# EAGLE board cyclops_r3p1 (EAGLE 6.4)
Cyclops 3.0 PCB Cyclops R3.0 High power LED driver Linear current control Optional linear optical power control Built-in DAC Wide bandwidth Appropriate for scientific applications: e.g. fluorescent imaging and optogenetics
PCB: Cyclops r3.1; REVISION: 3.1
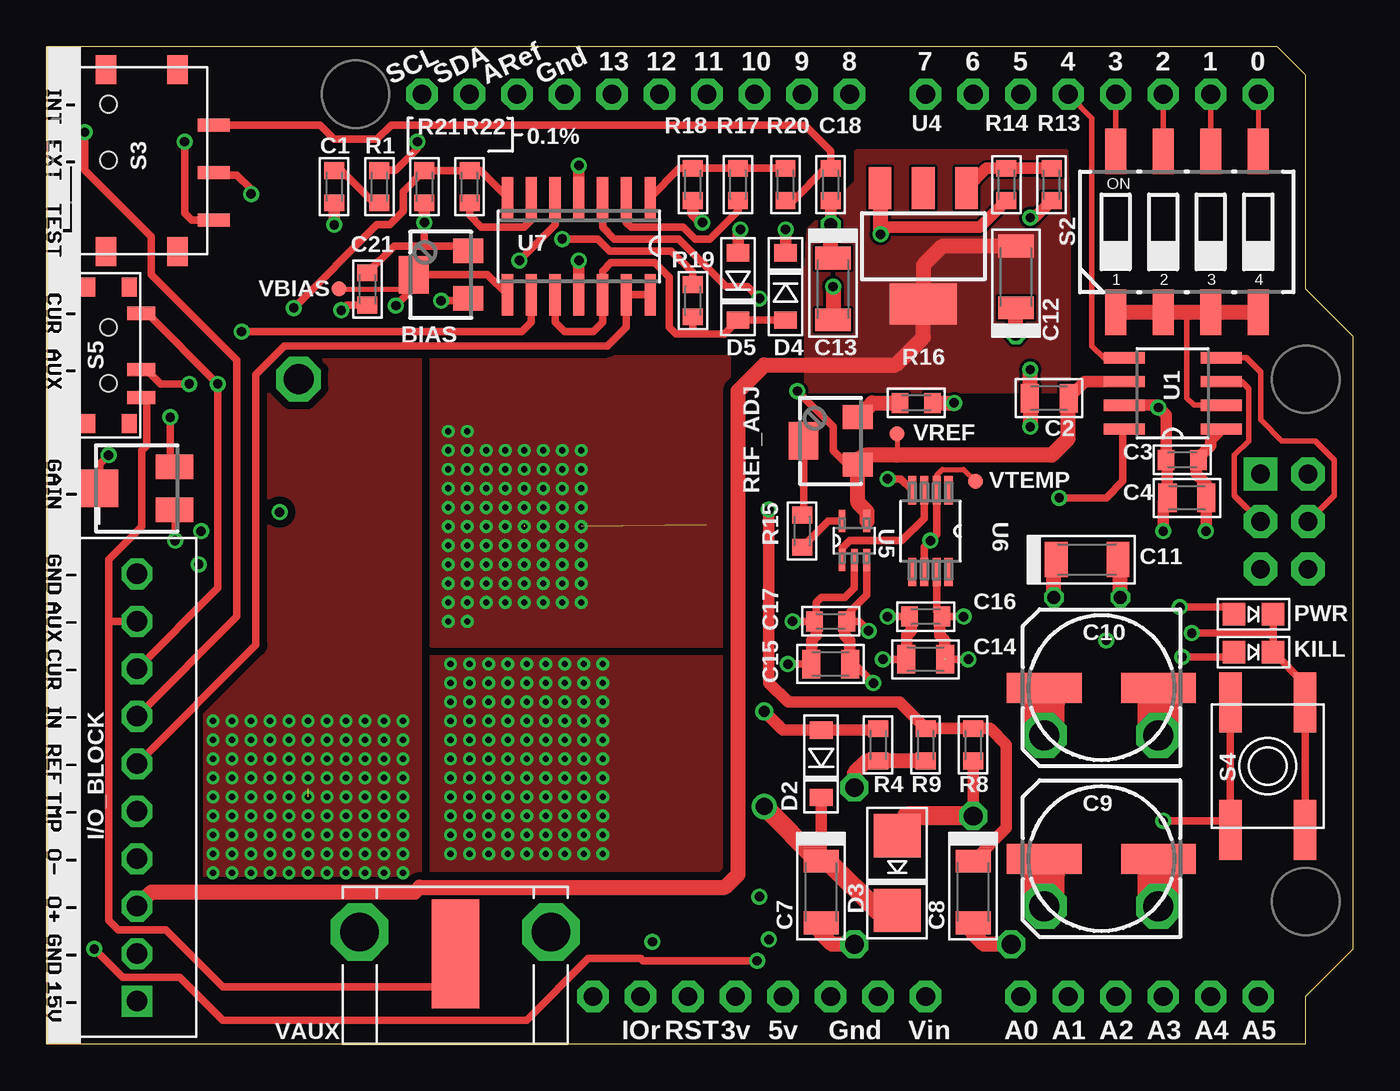
[diagram p0: board, top side]
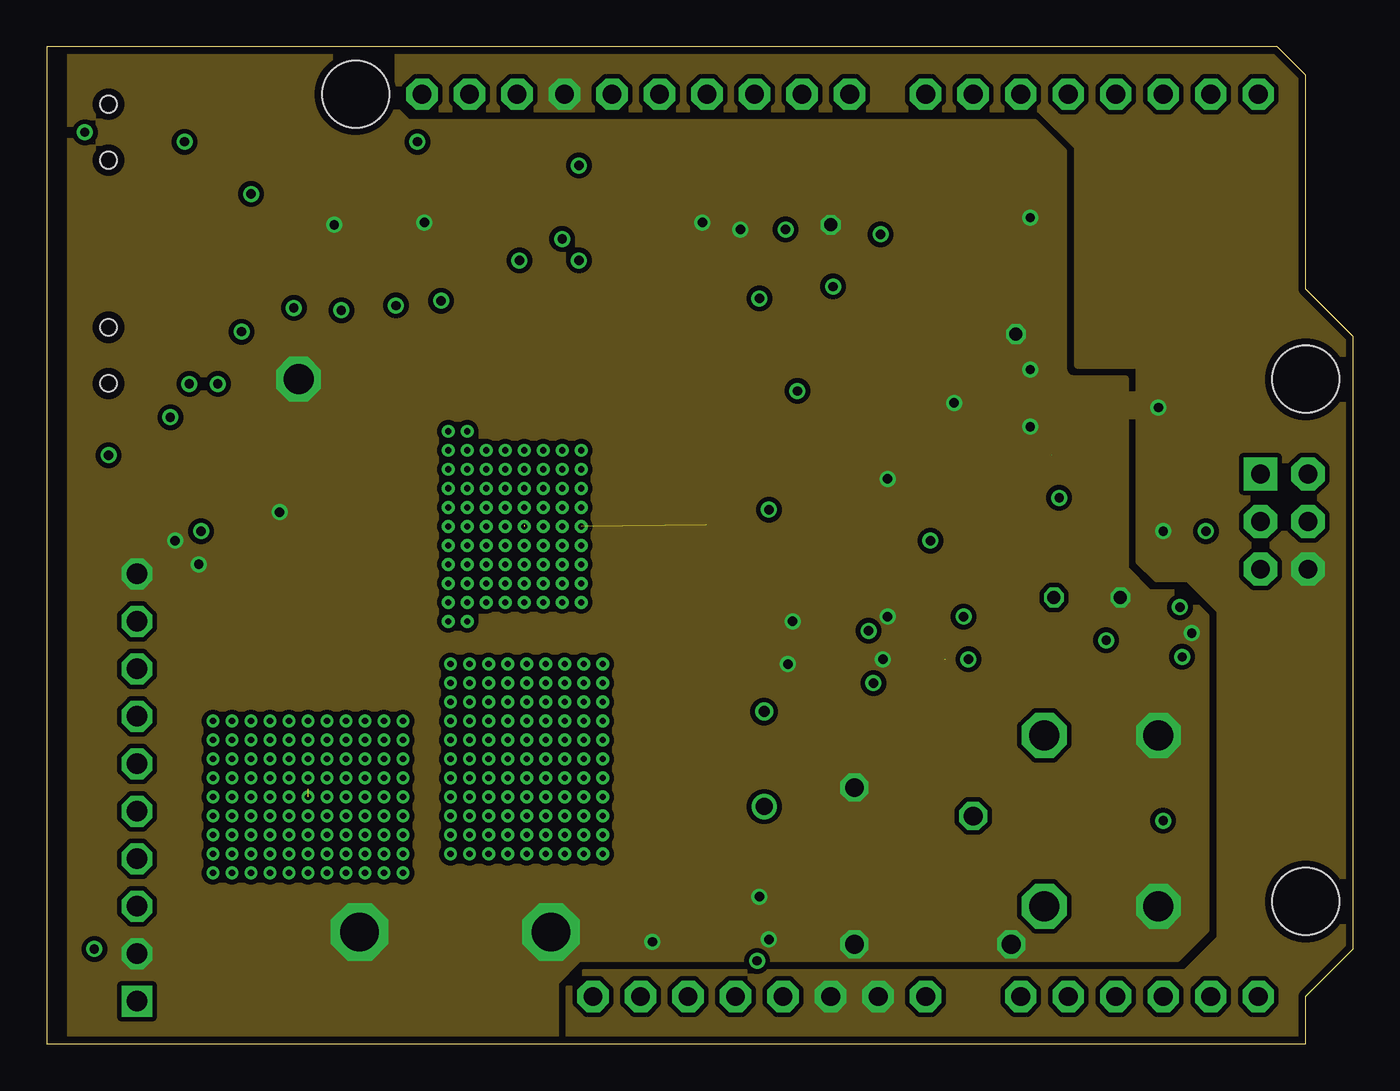
[diagram p1: board, inner layer Route2]
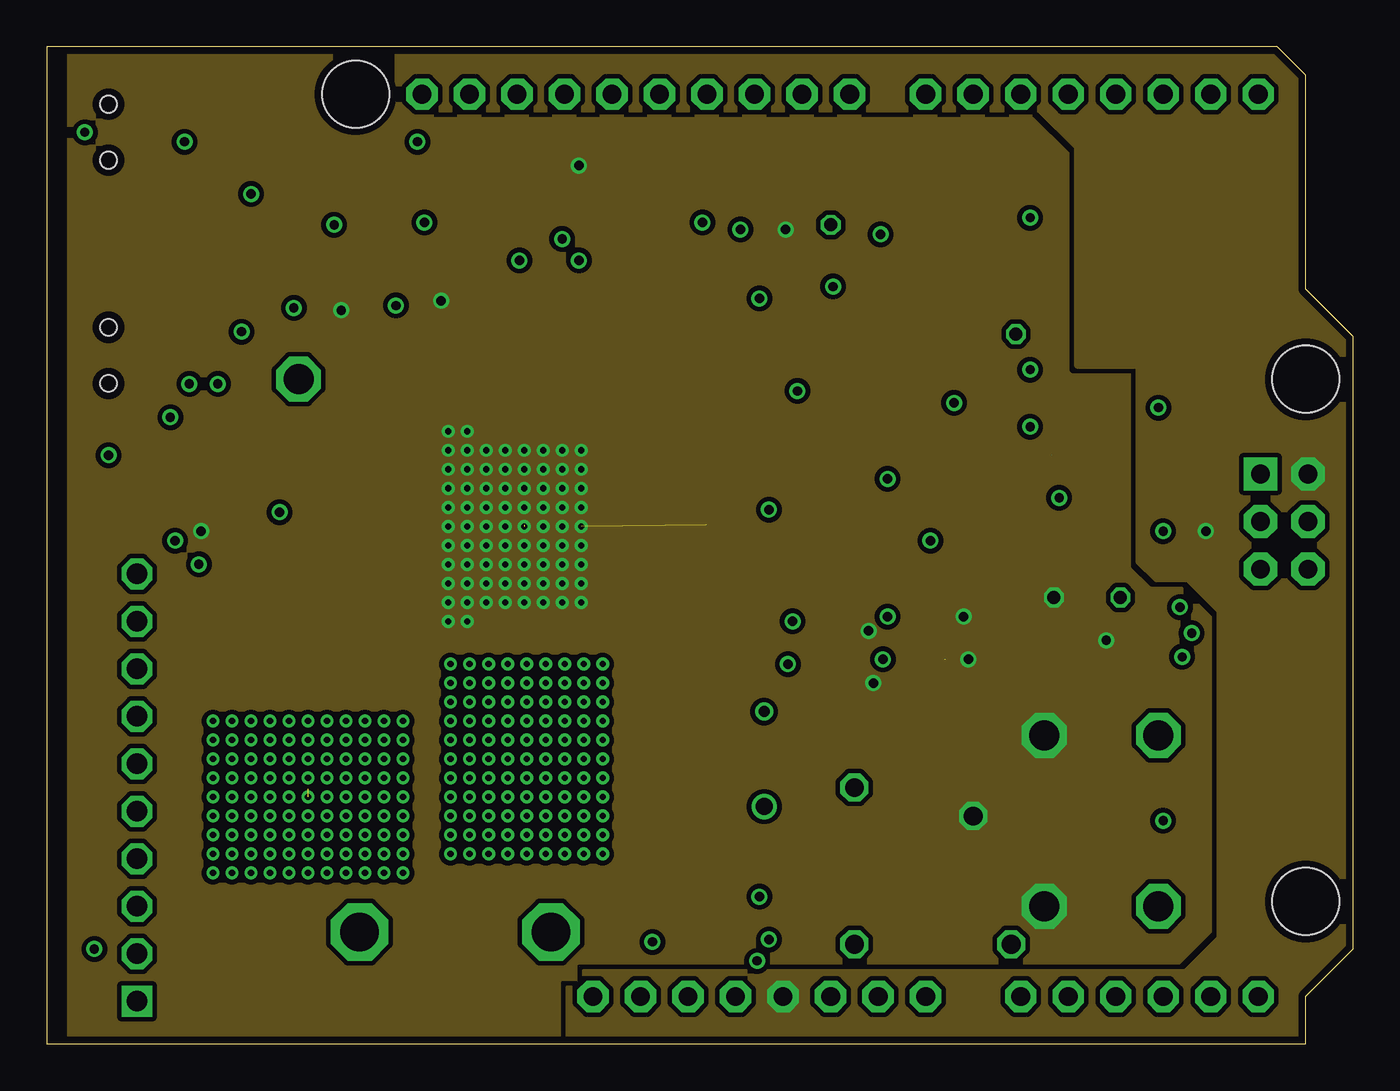
[diagram p2: board, inner layer Route15]
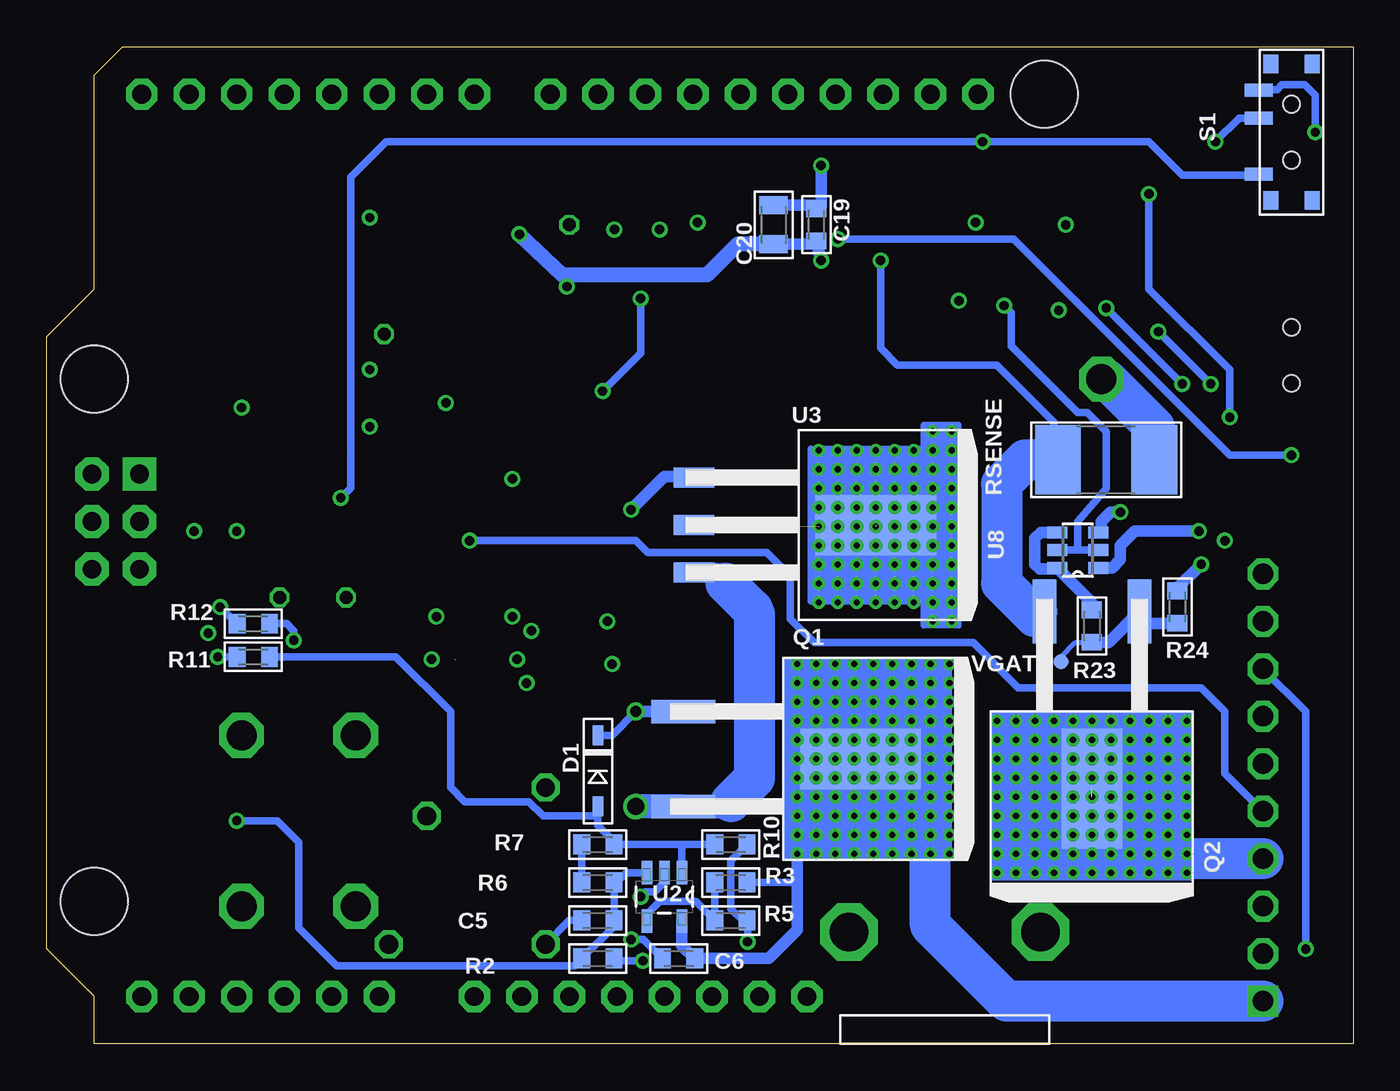
[diagram p3: board, bottom side, seen from below]

Size 69.85 x 53.34 mm. Coordinates in mm from the lower left corner, seen from the top.
Copper layers (1+2*15+16): Top 0.0356mm / dielectric 1.5011mm / Route2 0.0356mm / dielectric 0.1499mm / Route15 0.0356mm / dielectric 0.2007mm / Bottom 0.0356mm
Design rules "ohs-park-mod-4layer_tented-vias": minimum track width 6mil, minimum drill 13mil, track to track 6mil, track to pad 6mil, pad to pad 6mil, via to via 6mil, smd to smd 6mil, copper to edge 15mil, drill to drill 6mil, minimum pad ring 7mil, minimum via ring 7mil, stop-mask expansion 4mil, vias tented up to drill 100mil, thermal gap 10mil
tKeepout: area 8.6,5.6 to 38.6,35.6

## Footprints (pad centres in the part's own frame; a part is rotated, then mirrored left to right if it is on the bottom)
SM-42/43W = smd 1.3 x 1.6: 1 -1.27,-1.45; 3 1.27,-1.45 | smd 2 x 1.6: 2 0,1.45
0603 = smd 0.889 x 1.067: 1 -0.864,0; 2 0.864,0
0805 = smd 0.965 x 1.524: 1 -1.041,0; 2 1.041,0
1206-POL = smd 1.219 x 1.88: + -1.651,0; - 1.651,0
153CLV-0807 = smd 4 x 1.6: + 3.05,0; - -3.05,0
SM-42/43A = smd 2 x 1.3: 1 2,1.15; 3 2,-1.15 | smd 2 x 2: 2 -2,0
SOD-323F = smd 1.05 x 0.55: A -1.9,0; C 1.9,0
SOD123 = smd 0.914 x 1.219: A -1.8,0; C 1.8,0
SMA-DO214AC = smd 2.3 x 2.5: A -2,0; C 2,0
SCREW10 = drill 1.1 square: P$1 -11.43,0 | drill 1.1 octagon: P$2 -8.89,0; P$3 -6.35,0; P$4 -3.81,0; P$5 -1.27,0; P$6 1.27,0; P$7 3.81,0; P$8 6.35,0; P$9 8.89,0; P$10 11.43,0
CHIP-LED0805 = smd 1.2 x 1.2: A 0,-1.05; C 0,1.05
TO-262_01 = smd 3.251 x 6.452: D 0,4.128 | smd 1.27 x 3.429: G -2.54,-5.347; S 2.54,-5.347
2512 = smd 2.45 x 3.7: 1 -2.575,0; 2 2.575,0
PCM12 = smd 0.7 x 1.5: 1 -2.25,1.75; 2 0.75,1.75; 3 2.25,1.75 | smd 1 x 0.8: NC1 -3.65,1.1; NC2 -3.65,-1.1; NC3 3.65,-1.1; NC4 3.65,1.1 | hole 0.9: 1.5,0; -1.5,0
CTS-219-04 = smd 1.13 x 2.44: 1 -3.81,-4.3; 2 -1.27,-4.3; 3 1.27,-4.3; 4 3.81,-4.3; 5 3.81,4.3; 6 1.27,4.3; 7 -1.27,4.3; 8 -3.81,4.3
CFPA = smd 1.7 x 0.7: 1 3.85,1.9; 2 3.85,-0.64; 3 3.85,-3.18 | smd 1.1 x 1.55: NC1 -1.905,4.875; NC2 -1.905,-4.875; NC3 1.905,-4.875; NC4 1.905,4.875
EVQ-Q2 = smd 3.2 x 1.2: A -3.4,-2; A' 3.4,-2; B -3.4,2; B' 3.4,2
SO08 = smd 0.6 x 2.2: 1 -1.905,-2.6; 2 -0.635,-2.6; 3 0.635,-2.6; 4 1.905,-2.6; 5 1.905,2.6; 6 0.635,2.6; 7 -0.635,2.6; 8 -1.905,2.6
SOT95P280X145-5N = smd 1.27 x 0.559: 1 -1.295,0.94; 2 -1.295,0; 3 -1.295,-0.94; 4 1.295,-0.94; 5 1.295,0.94
TO-263 = smd 1.067 x 2.159: 1 -2.54,-7.188; 2 0,-7.188; 3 2.54,-7.188 | smd 3.251 x 6.452: 4 0,2.54
SOT223 = smd 1.219 x 2.235: 1 -2.311,-3.099; 2 0,-3.099; 3 2.311,-3.099 | smd 3.6 x 2.2: 4 0,3.099
SOT65P210X110-5N = smd 1.168 x 0.356: 1 -1.041,0.66; 2 -1.041,0; 3 -1.041,-0.66; 4 1.041,-0.66; 5 1.041,0.66
SOP65P490X110-8N = smd 1.499 x 0.432: 1 -2.184,0.965; 2 -2.184,0.33; 3 -2.184,-0.33; 4 -2.184,-0.965; 5 2.184,-0.965; 6 2.184,-0.33; 7 2.184,0.33; 8 2.184,0.965
SO14 = smd 0.6 x 2.2: 1 -3.81,-2.6; 2 -2.54,-2.6; 3 -1.27,-2.6; 4 0,-2.6; 5 1.27,-2.6; 6 2.54,-2.6; 7 3.81,-2.6; 8 3.81,2.6; 9 2.54,2.6; 10 1.27,2.6; 11 0,2.6; 12 -1.27,2.6; 13 -2.54,2.6; 14 -3.81,2.6
SOT23-6 = smd 0.65 x 1.06: 1 -0.95,-1.1; 2 0,-1.1; 3 0.95,-1.1; 4 0.95,1.1; 5 0,1.1; 6 -0.95,1.1
ARDUINOR3_ICSP = drill 1 pad 1.676 octagon: 3V 35.56,2.54; 5V 38.1,2.54; A0 50.8,2.54; A1 53.34,2.54; A2 55.88,2.54; A3 58.42,2.54; A4 60.96,2.54; A5 63.5,2.54; AREF 23.876,50.8; D0 63.5,50.8; D1 60.96,50.8; D2 58.42,50.8; D3 55.88,50.8; D4 53.34,50.8; D5 50.8,50.8; D6 48.26,50.8; D7 45.72,50.8; D8 41.656,50.8; D9 39.116,50.8; D10 36.576,50.8; D11 34.036,50.8; D12 31.496,50.8; D13 28.956,50.8; GND 26.416,50.8; GND$2 43.18,2.54; GND$3 40.64,2.54; IOREF 30.48,2.54; RESERVED 27.94,2.54; RESET 33.02,2.54; SCL 18.796,50.8; SDA 21.336,50.8; VIN 45.72,2.54 | drill 1 pad 1.778 octagon: +5V 66.167,30.48; GND$1 66.167,25.4; MOSI 66.167,27.94; RESET$1 63.627,25.4; SCK 63.627,27.94 | drill 1 pad 1.778 square: MISO 63.627,30.48 | hole 3.592: 15.24,50.8; 66.04,35.56; 66.04,7.62
361V509E = smd 2.54 x 5.842: 1 0,4.826 | drill 2.057 octagon: 2 -5.112,5.994; 3 5.112,5.994
TP08R = smd 0.8 x 0.8: TP 0,0

## Placement (x,y rotation side)
BIAS  10k  [SM-42/43W]  21.08,41.15 90 top
C1  ??  [0603]  15.37,45.85 270 top
C2  10uF  [0805]  53.59,34.54 180 top
C3  .1uF  [0603]  60.71,31.24 180 top
C4  1uF  [0805]  60.96,29.21 180 top
C5  10pF  [0603]  40.39,6.6 180 bottom
C6  .1uF  [0603]  36.07,4.57 180 bottom
C7  1uF  [1206-POL]  41.4,8.13 270 top
C8  10uF  [1206-POL]  49.53,8.13 270 top
C9  47uF  [153CLV-0807]  56.39,9.91 180 top
C10  47uF  [153CLV-0807]  56.39,19.05 180 top
C11  1uF  [1206-POL]  55.63,25.91 0 top
C12  1uF  [1206-POL]  51.82,41.02 90 top
C13  1uF  [1206-POL]  42.04,40.39 270 top
C14  1uF  [0805]  46.99,20.57 180 top
C15  1uF  [0805]  41.91,20.32 180 top
C16  .1uF  [0603]  46.99,22.86 180 top
C17  .1uF  [0603]  41.91,22.61 180 top
C18  .1uF  [0603]  41.91,45.97 270 top
C19  .1uF  [0603]  28.7,43.81 270 bottom
C20  1uF  [0805]  30.99,43.81 270 bottom
C21  .1uF  [0603]  17.14,40.39 90 top
CTL_K  1k  [SM-42/43A]  4.83,29.72 0 top
D1  [SOD-323F]  40.39,14.61 90 bottom
D2  MMSZ  [SOD123]  41.4,14.99 270 top
D3  S1B  [SMA-DO214AC]  45.47,9.14 270 top
D4  DS11015  [SOD123]  39.5,40.51 90 top
D5  DS11015  [SOD123]  36.96,40.51 270 top
I/O_BLOCK  SCREW10_0.1-THRU  [SCREW10]  4.83,13.72 90 top
KILL  [CHIP-LED0805]  64.52,20.95 270 top
PWR  [CHIP-LED0805]  64.52,22.99 270 top
Q1  SUM11006  [TO-262_01]  30.48,15.24 270 bottom
Q2  IRF510  [TO-262_01]  13.97,17.78 180 bottom
R1  ??  [0603]  17.78,45.85 90 top
R2  100k  [0603]  40.39,4.57 0 bottom
R3  56k  [0603]  33.27,8.64 180 bottom
R4  10k  [0603]  44.45,16 90 top
R5  4k  [0603]  33.27,6.6 0 bottom
R6  91k  [0603]  40.39,8.64 0 bottom
R7  1k  [0603]  40.39,10.67 180 bottom
R8  240  [0603]  49.53,16 270 top
R9  2.1k  [0603]  46.99,16 90 top
R10  220k  [0603]  33.27,10.67 180 bottom
R11  3.0k  [0603]  58.8,20.7 0 bottom
R12  2.4k  [0603]  58.8,22.48 0 bottom
R13  75  [0603]  53.72,45.97 270 top
R14  120  [0603]  51.31,45.97 90 top
R15  470  [0603]  40.39,27.43 270 top
R16  1k  [0603]  46.48,34.29 180 top
R17  1k  [0603]  36.96,45.97 270 top
R18  1k  [0603]  34.54,45.97 270 top
R19  1k  [0603]  34.54,39.75 270 top
R20  1k  [0603]  39.5,45.97 270 top
R21  1k  [0603]  20.19,45.85 270 top
R22  9k  [0603]  22.61,45.85 90 top
R23  10  [0603]  13.97,22.35 270 bottom
R24  1k  [0603]  9.4,23.37 270 bottom
REF_ADJ  10k  [SM-42/43W]  41.91,32.26 90 top
RSENSE  0.1,1W  [2512]  13.21,31.24 180 bottom
S1  INPUT SRC  [PCM12]  3.3,48.77 90 bottom
S2  219-04  [CTS-219-04]  60.96,43.43 0 top
S3  TEST  [CFPA]  5.08,47.24 0 top
S4  UNKILL  [EVQ-Q2]  65.28,14.86 270 top
S5  CURR/AUX  [PCM12]  3.3,36.83 270 top
U1  MCP4921  [SO08]  60.2,34.8 90 top
U2  TLV37  [SOT95P280X145-5N]  36.83,7.87 270 bottom
U3  317-N  [TO-263]  28.07,27.75 270 bottom
U4  337-N  [SOT223]  46.86,42.67 180 top
U5  ADR03  [SOT65P210X110-5N]  43.18,26.92 90 top
U6  OP1177  [SOP65P490X110-8N]  47.24,27.43 270 top
U7  LM324N  [SO14]  28.45,42.67 180 top
U8  ZXTD45  [SOT23-6]  14.73,26.42 90 bottom
U$1  ARDUINO_R3_ICSP  [ARDUINOR3_ICSP]  1.27,0 0 top
VAUX  [361V509E]  21.84,0 0 top
VBIAS  TPTP08R  [TP08R]  15.62,40.39 180 top
VGATE  TPTP08R  [TP08R]  15.62,20.45 0 bottom
VREF  TPTP08R  [TP08R]  45.47,32.64 0 top
VTEMP  TPTP08R  [TP08R]  49.66,30.1 0 top

## Library data of the parts
BIAS C1 C3 C5-C13 C16-C19 C21 CTL_K D1-D5 I/O_BLOCK Q1 Q2 REF_ADJ RSENSE S1 S3-S5 U1 U3 U4 U7 U8 U$1 VAUX VBIAS VGATE VREF VTEMP = cyclops
C2 C4 C14 C15 C20 = cyclops; MN: TDK Corp.; PARTNO: C2012X5R1Cxxxxxxx; VID: DK
KILL PWR = cyclops; DK: 350-2041-1-ND; MN: 598-8140-107F; MPN: Dialight
R1-R24 = cyclops; DK: PxxxxHTR-ND; MN: Panasonic; MPN: ERJ-3EKFxxxxV
S2 = cyclops; OC_FARNELL: unknown; OC_NEWARK: unknown
U2 = ti-extended; MPN: TLV3701CDBVT; OC_FARNELL: 8455538; OC_NEWARK: 76C8790; PACKAGE: SOT-23-5; SUPPLIER: Texas Instruments
U5 = cyclops; MPN: ADR03AKSZ-REEL7; OC_FARNELL: 1838919; OC_NEWARK: 59K2675; PACKAGE: SC70-5; SUPPLIER: Analog Devices
U6 = cyclops; MPN: OP1177ARMZ; OC_FARNELL: 2074880; OC_NEWARK: 22P9695; PACKAGE: MSOP-8; SUPPLIER: Analog Devices

## Nets
3V: U$1.3V
+5V: C3.1 C4.1 U1.1 U$1.5V U$1.+5V
+12V [pwr]: BIAS.1 C9.+ C10.+ C11.+ C14.1 C15.1 C16.1 C17.1 C19.1 C20.1 C21.1 D3.A D4.C R8.2 R12.2 U3.2 U3.4 U5.3 U6.7 U7.4 U8.1
+15V [pwr]: C6.1 I/O_BLOCK.P$1 Q1.D R3.1 U2.5
+15V_RECT [pwr]: C7.+ D2.C D3.C Q1.S U3.3
-2.1V: C13.- C19.2 C20.2 R14.1 U4.3 U7.11
-5V: C12.- I/O_BLOCK.P$3 U4.4
_VREF: D4.A D5.C R19.2 U7.10 U7.12
COMP+: C5.1 R2.1 R6.2 S4.A S4.A' U2.3
CS: S2.1 S2.2 S2.3 S2.4 U1.2
CS0: S2.5 U$1.D0
CS1: S2.6 U$1.D1
CS2: S2.7 U$1.D2
CS3: S2.8 U$1.D3
DACA: R1.2 S1.1 U1.8
GND: BIAS.3 C1.2 C2.2 C3.2 C4.2 C5.2 C6.2 C7.- C8.- C9.- C10.- C11.- C12.+ C13.+ C14.2 C15.2 C16.2 C17.2 C18.2 C21.2 CTL_K.3 D5.A I/O_BLOCK.P$2 I/O_BLOCK.P$10 KILL.C PWR.C R4.1 R5.2 R9.1 R10.1 R13.2 R16.1 R18.2 R21.2 R24.1 RSENSE.1 S4.B S4.B' U1.7 U2.2 U5.2 U6.4 U8.3 U$1.GND U$1.GND$1 U$1.GND$2 U$1.GND$3 VAUX.2 VAUX.3
KILL: D1.A R7.1 R10.2 R11.2 U2.1
LDAC: U1.5 U$1.D4
LED-: I/O_BLOCK.P$4 Q2.D
N$1: C1.1 R1.1
N$2: Q2.S RSENSE.2 U7.5
N$3: PWR.A R12.1
N$4: BIAS.2 U7.8 U8.2 U8.5 VBIAS.TP
N$5: R3.2 R5.1 U2.4
N$6: R16.2 REF_ADJ.3
N$7: CTL_K.2 R19.1
N$8: R17.2 U7.2
N$9: R6.1 R7.2
N$10: R23.1 U8.4 U8.6
N$11: KILL.A R11.1
N$12: R13.1 R14.2 U4.1
N$13: Q2.G R23.2 R24.2 VGATE.TP
N$15: R22.1 U7.6
N$18: D1.C D2.A Q1.G R4.2
N$20: R15.2 U5.5
N$22: R15.1 REF_ADJ.2
N$72: C8.+ R8.1 R9.2 U3.1
REFA: C2.1 REF_ADJ.1 U1.6 U5.4 U7.3 VREF.TP
REFA2X: C18.1 R20.2 S3.1
SCLK: U1.3 U$1.SCK
SDI: U1.4 U$1.MOSI
TEMP: U5.1 U6.3
VAUX: I/O_BLOCK.P$9 S5.3 VAUX.1
VCTL: CTL_K.1 S3.2
VCTL_PRE: S1.2 S3.3
VFB: S5.2 U7.9
VI: I/O_BLOCK.P$8 R2.2 R21.1 R22.2 S5.1 U7.7
VIN: U$1.VIN
VINPUT: I/O_BLOCK.P$7 S1.3
VREF: I/O_BLOCK.P$6 U7.13 U7.14
VREFA2X: R17.1 R18.1 R20.1 U7.1
VTEMP: I/O_BLOCK.P$5 U6.2 U6.6 VTEMP.TP

## Tracks (layer width: path | path; a pad name or v marks a point on that pad's centre or on a via)
+5V  (via drill 0.5)
  Top 0.61: U1.1 62.23,32.33 62.23,32 61.57,31.34 | 61.57,31.34 C3.1 | v61.98,27.43 62,27.46 C4.1 62,29.95 61.47,30.48 61.47,31.24 61.57,31.34
  pour Route15 (isolate 0.254, no thermals): 71.12,0 27.94,0 27.94,3.01 28.74,3.81 60.91,3.81 62.74,5.64 62.74,23.19 61.03,24.89 59.34,24.89 58.42,25.81 58.42,36.28 55.12,36.32 55.12,47.99 53.07,50.04 19.51,50.04 18.8,50.76 18.8,53.34 71.12,53.34
+12V  (via drill 0.33, 0.5, 0.7, 1, 1.6)  (3 unrouted)
  Top 0.254: C17.1 42.67,22.61
  Top 0.406: v43.94,22.1 43.43,22.61 C17.1 42.93,22.76 42.93,23.11 43.84,24.03 U5.3 | C15.1 43.18,20.32 v44.2,19.3 | C14.1 v49.28,20.57 | v49.02,22.86 C16.1 47.57,23.14 U6.7 | v15.75,39.24 16.03,39.52 C21.1 | v21.08,39.75 22.99,39.75 arc90 23.11,39.88 BIAS.1
  Top 0.61: v49.53,12.19 R8.2 | 28.45,44.96 U7.4 v28.45,46.99 | 42.93,20.57 42.93,21.59 42.67,21.84 42.67,22.61 | 48.01,20.57 48.01,21.59 47.75,21.84 47.75,22.86 | D4.C v39.5,43.56
  Top 0.813: v53.85,23.88 53.85,26.16 54.1,26.42 54.1,26.04 C11.+
  Top 1.016: v49.53,12.19 45.97,12.19 45.47,11.43 D3.A
  Top 1.27: 53.34,18.29 C10.+ | 53.34,9.14 53.34,9.15 C9.+
  Top 2.184: v53.34,16.51 53.34,18.29 | v53.34,7.37 53.34,9.14
  Bottom 0.406: v56.64,21.59 56.64,22.1 57.02,22.48 R12.2
  Bottom 0.61: U8.1 12.89,25.47 12.45,25.91 12.45,26.67 11.68,27.43 v8.26,27.43 | v28.45,46.99 28.45,44.81 C19.1 28.88,44.86 C20.1
  other vias: 21.46,32.77 21.46,31.75 21.46,30.73 21.46,29.72 21.46,28.7 21.46,27.69 21.46,26.67 21.46,25.65 21.46,22.61 22.48,22.61 22.48,25.65 22.48,26.67 22.48,27.69 22.48,28.7 22.48,29.72 22.48,30.73 22.48,31.75 22.48,32.77 23.5,31.75 23.5,30.73 23.5,29.72 23.5,28.7 23.5,27.69 23.5,26.67 23.5,25.65 24.51,25.65 24.51,26.67 24.51,27.69 24.51,28.7 24.51,29.72 24.51,30.73 24.51,31.75 25.53,31.75 25.53,30.73 25.53,29.72 25.53,28.7 25.53,27.69 25.53,26.67 25.53,25.65 26.54,25.65 26.54,26.67 26.54,27.69 26.54,28.7 26.54,29.72 26.54,30.73 26.54,31.75 27.56,31.75 27.56,30.73 27.56,29.72 27.56,28.7 27.56,27.69 27.56,26.67 27.56,25.65 28.57,25.65 28.57,26.67 28.57,27.69 28.57,28.7 28.57,29.72 28.57,30.73 28.57,31.75 21.46,24.64 22.48,24.64 23.5,24.64 24.51,24.64 25.53,24.64 26.54,24.64 27.56,24.64 28.57,24.64 28.57,23.62 27.56,23.62 26.54,23.62 25.53,23.62 24.51,23.62 23.5,23.62 22.48,23.62 21.46,23.62
  pour Route15 (isolate 0.254, rank 2, no thermals): 1.27,53.34 18.8,53.34 18.8,50.8 19.56,50.04 53.09,50.04 55.12,48.01 55.12,36.32 58.42,36.32 58.42,25.91 59.44,24.89 60.96,24.89 62.74,23.11 62.74,5.84 60.71,3.81 28.7,3.81 27.94,3.05 27.94,0 1.27,0
  pour Top (isolate 0.406, no thermals): 20.57,36.7 20.57,21.34 36.45,21.34 36.45,36.7
+15V  (via drill 0.33)
  Bottom 0.406: R3.1 29.97,8.64 29.72,8.38
  Bottom 0.61: v29.72,10.16 29.72,8.38 29.72,6.1 31.24,4.57 C6.1 35.89,5.26 U2.5
  Bottom 2.184: 26.1,14.16 26.1,14.48 26.16,14.41 | 26.1,14.16 Q1.D 26.04,15.24 | 26.1,14.16 25.84,14.16 v25.65,14.22 | v25.65,15.24 v22.61,12.19 22.61,6.35 18.54,2.29 I/O_BLOCK.P$1
  other vias: 21.59,20.32 22.61,20.32 23.62,20.32 24.64,20.32 25.65,20.32 26.67,20.32 27.69,20.32 28.7,20.32 29.72,20.32 21.59,10.16 22.61,10.16 23.62,10.16 24.64,10.16 25.65,10.16 26.67,10.16 27.69,10.16 28.7,10.16 21.59,12.19 23.62,12.19 24.64,12.19 25.65,12.19 26.67,12.19 27.69,12.19 28.7,12.19 29.72,12.19 21.59,11.18 22.61,11.18 23.62,11.18 24.64,11.18 25.65,11.18 26.67,11.18 27.69,11.18 28.7,11.18 29.72,11.18 21.59,14.22 22.61,14.22 23.62,14.22 24.64,14.22 26.67,14.22 27.69,14.22 28.7,14.22 29.72,14.22 21.59,15.24 22.61,15.24 23.62,15.24 24.64,15.24 26.67,15.24 27.69,15.24 28.7,15.24 29.72,15.24 21.59,16.26 22.61,16.26 23.62,16.26 24.64,16.26 25.65,16.26 26.67,16.26 27.69,16.26 28.7,16.26 29.72,16.26 21.59,17.27 22.61,17.27 23.62,17.27 24.64,17.27 25.65,17.27 26.67,17.27 27.69,17.27 28.7,17.27 29.72,17.27 21.59,18.29 22.61,18.29 23.62,18.29 24.64,18.29 25.65,18.29 26.67,18.29 27.69,18.29 28.7,18.29 29.72,18.29 21.59,19.3 22.61,19.3 23.62,19.3 24.64,19.3 25.65,19.3 26.67,19.3 27.69,19.3 28.7,19.3 29.72,19.3 21.59,13.21 22.61,13.21 23.62,13.21 24.64,13.21 25.65,13.21 26.67,13.21 27.69,13.21 28.7,13.21 29.72,13.21
  pour Top (isolate 0.406, rank 2): 20.57,21.34 20.57,8.76 36.44,8.76 36.44,21.34
+15V_RECT  (via drill 0.9)
  Top 0.61: C7.+ 41.78,9.78 41.4,10.16 D2.C | 44.45,7.11 44.93,7.11
  Top 0.813: 44.93,7.11 D3.C
  Top 1.016: 41.78,9.78 44.45,7.11 | v38.35,12.7 41.28,9.78 C7.+
  Bottom 1.016: 33.66,24.89 33.97,25.21 U3.3
  Bottom 1.27: 33.27,12.95 33.53,12.7 Q1.S v38.35,12.7
  Bottom 1.676: 33.53,24.64 33.53,24.77 33.66,24.89
  Bottom 2.184: 33.27,12.95 32,14.22 32,22.99 32.13,23.24 33.53,24.64
-2.1V  (via drill 0.5)
  Top 0.61: U7.11 v28.45,41.91 | v44.58,43.31 44.96,43.69 49.89,43.69 R14.1
  Top 0.813: v42.04,40.51 C13.- | U4.3 44.55,43.33 v44.58,43.31
  Bottom 0.61: C20.2 28.88,42.77 C19.2 28.7,42.93 v28.45,41.91
  Bottom 0.813: v44.58,43.31 42.29,41.15 | 42.29,41.15 34.54,41.15 32.89,42.8 30.5,42.8 C20.2 | 42.29,41.15 42.04,40.89 v42.04,40.51
-5V
  Top 0.813: C12.- 47.88,42.67 46.86,41.66 U4.4 46.86,37.8 45.39,36.32 38.35,36.32 36.96,34.92 36.96,9.07 36.27,8.38 19.94,8.38 19.68,8.13 5.59,8.13 I/O_BLOCK.P$3
  pour Top (no thermals): 43.31,47.75 54.48,47.75 54.61,43.18 54.61,34.92 40.64,34.92 40.64,41.4 40.77,43.56 43.31,46.1
_VREF
  Top 0.406: D4.A D5.C 36.22,37.97 34.54,37.97 | U7.10 27.18,38.61 27.69,38.1 29.21,38.1 29.72,38.61 U7.12 29.72,41.34 30.16,41.78 32.51,41.78 33.27,41.02 33.27,38.35 33.66,37.97 34.54,37.97 | R19.2 34.54,37.97
COMP+  (via drill 0.5)
  Top 0.406: v59.69,11.94 62.8,11.94 S4.A' S4.A
  Bottom 0.406: U2.3 37.8,9.14 38.86,9.14 39.29,8.71 39.29,8.66 R6.2 C5.1 39.52,6.3 R2.1 41.63,4.19 54.36,4.19 56.39,6.22 56.39,10.79 57.53,11.94 v59.69,11.94
CS
  Top 0.254: S2.2 59.71,39.12 60.96,39.12
  Top 0.305: 60.96,39.12 60.96,34.54 61.34,34.16 U1.2
  Top 0.813: S2.1 S2.2 S2.3 S2.4
CS0
  Top 0.254: U$1.D0 S2.5
CS1
  Top 0.305: U$1.D1 S2.6
CS2
  Top 0.305: U$1.D2 S2.7
CS3
  Top 0.305: U$1.D3 S2.8
DACA  (via drill 0.5)
  Top 0.406: U1.8 57.53,32.89 57.53,30.1 56.64,29.21 v54.13,29.21 | R1.2 17.78,46.74 18.67,46.74 19.81,47.88 v19.81,48.26
  Bottom 0.406: v54.13,29.21 53.59,29.75 53.59,46.35 51.69,48.26 v19.81,48.26 10.92,48.26 9.14,46.48 5.09,46.48 S1.1 5.08,46.55
GND  (via drill 0.5, 0.7, 1, 1.6)
  Top 0.254: 41.15,22.71 41.15,22.61
  Top 0.406: v44.96,22.86 C16.2 | v44.7,20.57 45.97,20.57 45.7,20.83 C14.2 | v39.88,22.61 C17.2 41.15,22.71 41.15,23.62 41.4,23.88 42.67,23.88 43.18,24.38 U5.2 43.18,25.91 | C15.2 v39.62,20.32 | v6.86,26.92 6.86,28.54 CTL_K.3 | v44.96,30.23 45.67,30.23 U6.4 | 65.57,21.97 KILL.C 67.28,19.24 S4.B S4.B' 67.28,11.14 | PWR.C 65.57,21.97 | 65.57,21.97 v61.21,21.97 | C21.2 18.57,42.67 20.07,42.67 | 20.07,42.67 21.97,42.67 22.22,42.42 BIAS.3 | v20.19,43.94 20.19,42.8 arc-90 20.07,42.67 | 59.82,8.38 59.44,8
  Top 0.61: v59.69,27.43 59.69,28.98 C4.2 59.92,31.17 C3.2 59.84,33.63 v59.44,34.04 59.31,34.16 U1.7 | 45.97,20.57 45.97,21.84 46.23,22.1 46.23,22.86 | 40.89,20.57 40.89,21.59 41.15,21.84 41.15,22.61 | v35.05,43.94 34.54,44.45 R18.2 | v37.08,43.56 36.96,43.43 D5.A | v41.91,43.81 C18.2 | v20.19,43.94 R21.2 | v15.37,43.81 C1.2 | R13.2 52.81,44.2 v52.58,44.2
  Top 0.813: v43.18,5.33 41.97,5.33 41.4,5.9 C7.- | v51.56,5.33 50.1,5.33 49.53,5.9 C8.- | R9.1 R4.1 43.83,15.14 43.18,14.49 v43.18,13.72 | R16.1 v48.51,34.29 | C2.2 52.58,34.57 v52.58,36.07 | 52.58,34.54 v52.58,33.02 | v57.4,23.88 57.4,25.78 C11.- | C13.+ 41.91,42.16 v41.91,43.81 | v51.82,37.97 C12.+
  Top 1.27: 59.44,18.54 C10.- | 59.44,9.14 59.44,9.15 C9.-
  Top 2.184: v59.44,16.51 59.44,18.54 | v59.44,7.37 59.44,8 59.44,9.14
  Bottom 0.406: 13.46,27.54 U8.3 | R10.1 33.27,9.8 33.27,7.24 32.64,6.6 R5.2 32.38,6.58 v32.38,5.46 | U2.2 36.83,8.64 37.34,8.13 37.85,8.13 v38.1,7.87 | C6.2 37.95,5.59 v38.61,5.59 | C5.2 41.91,6.6 v43.18,5.33
  Bottom 0.61: v12.45,28.45 12.95,28.45 13.46,27.94 13.46,27.54 | R24.1 9.4,24.38 v8.13,25.65
  Bottom 2.184: RSENSE.1 10.63,32.98 13.21,35.56 v13.46,35.56
  pour Route2 (isolate 0.254, no thermals): 71.12,0 27.94,0 27.94,3.01 28.74,3.81 60.91,3.81 62.74,5.64 62.74,23.19 61.03,24.89 59.34,24.89 58.42,25.81 58.42,36.28 55.12,36.32 55.12,47.99 53.07,50.04 19.51,50.04 18.8,50.76 18.8,53.34 71.12,53.34
  pour Route2 (no thermals): 56.9,34.8 59.44,34.8 59.44,33.53 56.9,33.53
  pour Route2 (isolate 0.254, rank 2, no thermals): 1.27,53.34 18.03,53.34 18.03,50.55 19.3,49.28 52.83,49.28 54.36,47.75 54.36,36.13 arc90 54.92,35.56 57.66,35.56 57.66,25.4 58.93,24.13 60.71,24.13 61.98,22.86 61.98,6.1 60.45,4.57 28.45,4.57 27.18,3.3 27.18,0 1.27,0
KILL
  Bottom 0.406: R10.2 35.89,10.67 | 35.89,10.67 R7.1 39.52,10.82 40.39,11.68 40.39,12.19 | U2.1 35.89,10.67 | 40.39,12.19 D1.A | 40.39,12.19 43.31,12.19 44.07,12.95 47.5,12.95 48.26,13.72 48.26,17.78 51.18,20.7 R11.2
LDAC
  Top 0.305: U$1.D4 55.88,49.53 55.88,37.34 56.52,36.7 U1.5
LED-  (via drill 0.33)  (1 unrouted)
  Bottom 2.184: 10.99,10.67 Q2.D | I/O_BLOCK.P$4 13.97,9.91 v13.97,15.24
  other vias: 11.94,15.24 12.95,15.24 14.99,15.24 17.02,15.24 18.03,15.24 19.05,15.24 19.05,16.26 18.03,16.26 17.02,16.26 14.99,16.26 13.97,16.26 12.95,16.26 11.94,16.26 19.05,17.27 18.03,17.27 17.02,17.27 14.99,17.27 13.97,17.27 12.95,17.27 11.94,13.21 12.95,13.21 13.97,13.21 14.99,13.21 17.02,13.21 18.03,13.21 19.05,13.21 19.05,14.22 18.03,14.22 17.02,14.22 14.99,14.22 13.97,14.22 12.95,14.22 11.94,14.22 11.94,11.18 12.95,11.18 13.97,11.18 14.99,11.18 17.02,11.18 18.03,11.18 19.05,11.18 19.05,12.19 18.03,12.19 17.02,12.19 14.99,12.19 13.97,12.19 12.95,12.19 11.94,12.19 11.94,9.14 12.95,9.14 13.97,9.14 14.99,9.14 17.02,9.14 18.03,9.14 19.05,9.14 19.05,10.16 18.03,10.16 17.02,10.16 14.99,10.16 13.97,10.16 12.95,10.16 11.94,10.16 9.91,13.21 9.91,10.16 9.91,9.14 8.89,12.19 8.89,14.22 8.89,15.24 8.89,16.26 9.91,12.19 9.91,11.18 8.89,10.16 8.89,11.18 9.91,16.26 9.91,17.27 11.94,17.27 16,15.24 16,16.26 16,17.27 16,13.21 16,14.22 16,11.18 16,12.19 16,9.14 16,10.16 8.89,13.21 8.89,17.27 10.92,17.27 10.92,14.22 10.92,15.24 10.92,12.19 10.92,13.21 10.92,10.16 10.92,11.18 8.89,9.14 10.92,9.14 9.91,15.24 9.91,14.22 10.92,16.26
  pour Top (isolate 0.406, rank 3, no thermals): 11.18,36.7 20.57,36.7 20.57,8.76 8.51,8.76 8.51,18.67 11.18,21.34
N$1
  Top 0.406: C1.1 15.77,46.71 17.5,44.98 R1.1
N$2  (via drill 0.5)
  Top 0.406: U7.5 27.18,43.81 v25.27,41.91
  Bottom 0.406: 16,31.24 RSENSE.2 16,31.46 16,33.27 19.05,36.32 24.38,36.32 25.27,37.21 v25.27,41.91
  Bottom 1.422: 17.02,22.86 17,22.86 Q2.S
  Bottom 2.184: RSENSE.2 17.53,31.24 18.8,29.97 18.8,24.64 17.02,22.86
N$3  (via drill 0.5)
  Top 0.406: v60.58,23.37 63.85,23.37 | 63.88,23.37 63.85,23.37 | 63.85,23.37 PWR.A
  Bottom 0.406: R12.1 59.69,22.48 v60.58,23.37
N$4  (via drill 0.5)
  Top 0.254: VBIAS.TP 19.56,40.39 19.63,40.46
  Top 0.406: U7.8 23.56,41.15 BIAS.2 19.63,40.46 v18.67,39.5
  Bottom 0.406: 13.53,26.31 U8.2 14.73,26.42 | 14.73,26.42 U8.5 | 14.73,26.42 14.73,27.94 13.21,29.72 13.21,32.77 14.22,33.78 14.73,33.78 18.29,37.34 18.29,39.12 v18.67,39.5
N$5
  Bottom 0.406: U2.4 37.77,6.93 37.08,7.62 35.15,7.62 R5.1 R3.2
N$6
  Top 0.813: REF_ADJ.3 44.12,34.29 R16.2
N$7  (via drill 0.5)
  Top 0.406: CTL_K.2 2.83,31.02 v3.3,31.5 | v27.56,43.05 29.46,43.05 30.1,42.42 33.4,42.42 34.54,41.27 R19.1
  Bottom 0.406: v3.3,31.5 6.6,31.5 18.16,43.05 v27.56,43.05 27.43,43.05
N$8
  Top 0.406: U7.2 30.99,43.94 31.24,43.69 34.04,43.69 34.67,43.05 35.43,43.05 36.96,44.58 36.96,45.09
  Top 0.61: 36.96,45.09 R17.2
N$9
  Bottom 0.406: R6.1 R7.2
N$10
  Bottom 0.61: U8.4 16.7,27.37 17.02,27.05 17.02,25.65 16.76,25.4 15.9,25.4 U8.6 13.97,23.6 R23.1
N$11  (via drill 0.5)
  Top 0.406: v60.71,20.7 63.37,20.7 63.34,20.83 arc90 KILL.A
  Bottom 0.406: R11.1 v60.71,20.7
N$12
  Top 0.61: U4.1 50.24,46.84 R14.2 R13.1
N$13
  Bottom 0.254: VGATE.TP 15.62,20.7 14.86,21.46 13.99,21.46 R23.2
  Bottom 0.61: R23.2 13.07,21.49 Q2.G 11.43,22.61 11.33,22.5 R24.2
N$15
  Top 0.406: R22.1 22.61,44.32 23.24,43.69 25.53,43.69 25.91,44.07 U7.6
N$18  (via drill 0.6)
  Top 0.61: R4.2 44.37,16.79 D2.A 39.35,16.79 v38.35,17.78
  Bottom 0.406: D1.C 39.63,16.5 v38.35,17.78
  Bottom 0.61: v38.35,17.78 Q1.G
N$20
  Top 0.406: R15.2 41.78,27.96 U5.5
N$22
  Top 0.406: 40.64,32.08 REF_ADJ.2 40.46,28.37 R15.1
N$72  (via drill 0.5)
  Top 0.61: C8.+ 51.31,11.56 51.31,16 50.44,16.87 R8.1 R9.2 45.57,18.29 39.64,18.29 38.61,19.32 v38.61,28.57
  Bottom 0.61: U3.1 35.32,30.35 36.83,30.35 v38.61,28.57
REFA  (via drill 0.5)  (1 unrouted)
  Top 0.254: VREF.TP 45.47,31.5 45.47,31.24
  Top 0.406: 54.61,34.52 54.61,34.29 | U7.3 29.72,43.69 30.35,43.05 33.78,43.05 36.32,40.51 37.47,40.51 v38.1,39.88 | REF_ADJ.1 42.8,30.99 42.04,31.75 42.04,33.02 v40.13,34.92
  Top 0.61: 54.64,34.57 55.5,35.43 U1.6
  Top 0.813: REF_ADJ.1 43.36,28.95 43.84,28.47 U5.4 | REF_ADJ.1 43.36,31.17 43.43,31.24 | 53.73,31.5 54.61,32.38 54.61,34.52 C2.1 54.64,34.57 | 53.72,31.5 45.47,31.5 43.87,31.5 arc90 REF_ADJ.1 | 43.61,31.24 REF_ADJ.1
  Bottom 0.406: v38.1,39.88 38.1,36.96 v40.13,34.92
REFA2X
  Top 0.406: R20.2 39.9,45.11 41.63,46.84 C18.1 41.91,47.75 40.52,49.14 18.41,49.15 17.65,48.39 15.37,48.39 14.61,49.14 S3.1
SCLK
  Top 0.254: 63.88,35.43 U1.3
  Top 0.305: U$1.SCK 63.5,29.34 63.5,31.5 64.26,32.26 64.26,35.05 63.88,35.43
SDI
  Top 0.305: U$1.MOSI 68.83,29.34 68.83,31.24 67.82,32.26 66.04,32.26 64.9,33.4 64.9,35.94 64.14,36.7 U1.4
TEMP
  Top 0.406: U5.1 42.52,26.52 42.93,26.92 45.72,26.92 46.91,28.12 U6.3
VAUX
  Top 0.406: I/O_BLOCK.P$9 3.3,22.61 | 3.3,22.61 3.3,25.91 5.08,27.69 5.08,31.75 5.33,32 5.33,34.3 S5.3 | 3.3,22.61 3.3,6.6 3.81,6.1 6.35,6.1 9.4,3.05 21.59,3.05 21.84,3.3 VAUX.1 | VAUX.1 21.34,5.08 | 20.83,3.56 20.83,4.32 VAUX.1 | 21.46,4.83 VAUX.1
VCTL  (via drill 0.5)
  Top 0.406: 6.86,30.9 CTL_K.1 arc-90 6.6,31.09 v6.6,33.53 | v10.92,45.47 10.92,45.72 10.16,46.48 9.05,46.48 S3.2
  Bottom 0.406: v6.6,33.53 6.6,36.07 10.92,40.39 v10.92,45.47
VCTL_PRE  (via drill 0.5)
  Top 0.406: S3.3 7.75,44.06 7.37,44.45 v7.37,48.26
  Bottom 0.406: v7.37,48.26 6.1,49.53 5.06,49.53 S1.2
VFB  (via drill 0.5)
  Top 0.406: v7.62,35.31 6.1,35.31 5.32,36.08 S5.2 | v10.41,38.1 25.4,38.1 25.91,38.61 U7.9
  Bottom 0.406: v10.41,38.1 v7.62,35.31
VI  (via drill 0.5)
  Top 0.406: S5.1 5.3,39.08 5.33,39.12 v9.14,35.31 9.14,24.38 I/O_BLOCK.P$8 | U7.7 23.2,46.71 R22.2 R21.1 20.17,46.71 19.05,45.59 19.05,44.53 18.33,43.81 17.65,43.81 v13.21,39.37 | v2.54,5.08 4.06,3.56 7.11,3.56 9.4,1.27 25.65,1.27 28.96,4.57 31.75,4.57 31.88,4.45 v37.97,4.45
  Bottom 0.406: v13.21,39.37 v9.14,35.31 | I/O_BLOCK.P$8 2.54,17.78 v2.54,5.08 | v37.97,4.45 39.4,4.45 arc90 R2.2
VINPUT  (via drill 0.5)
  Top 0.406: v2.03,48.77 2.03,46.74 5.59,43.18 5.59,41.15 10.16,36.58 10.16,22.86 I/O_BLOCK.P$7
  Bottom 0.406: S1.3 5.02,51.05 4.06,51.05 3.81,51.31 2.6,51.31 2.03,50.74 v2.03,48.77
VREF
  Top 0.406: U7.14 U7.13 30.99,38.35 29.97,37.34 12.7,37.34 11.18,35.81 11.18,21.34 I/O_BLOCK.P$6
VREFA2X
  Top 0.406: U7.1 33.82,46.84 R18.1 R17.1 R20.1
VTEMP  (via drill 0.5)
  Top 0.254: U6.2 47.57,30.43 47.88,30.73 49.02,30.73 VTEMP.TP
  Top 0.406: U6.2 47.57,27.25 v47.24,26.92 46.91,26.59 U6.6
  Bottom 0.406: I/O_BLOCK.P$5 6.86,14.48 6.86,17.78 8.13,19.05 17.91,19.05 20.32,21.46 28.83,21.46 30.1,22.73 30.1,25.02 31.37,26.29 37.72,26.29 38.35,26.92 v47.24,26.92

## Text on the board
tPlace: 0.1%